# Altium PCB main.PcbDoc
Units mm, origin at the board's own origin, x right, y up, seen from the top; angles counter-clockwise.
Board outline 80 x 125 mm, 2 copper layers (Top Layer, Bottom Layer); 29 components, 91 nets, 296 pads, 11 vias.
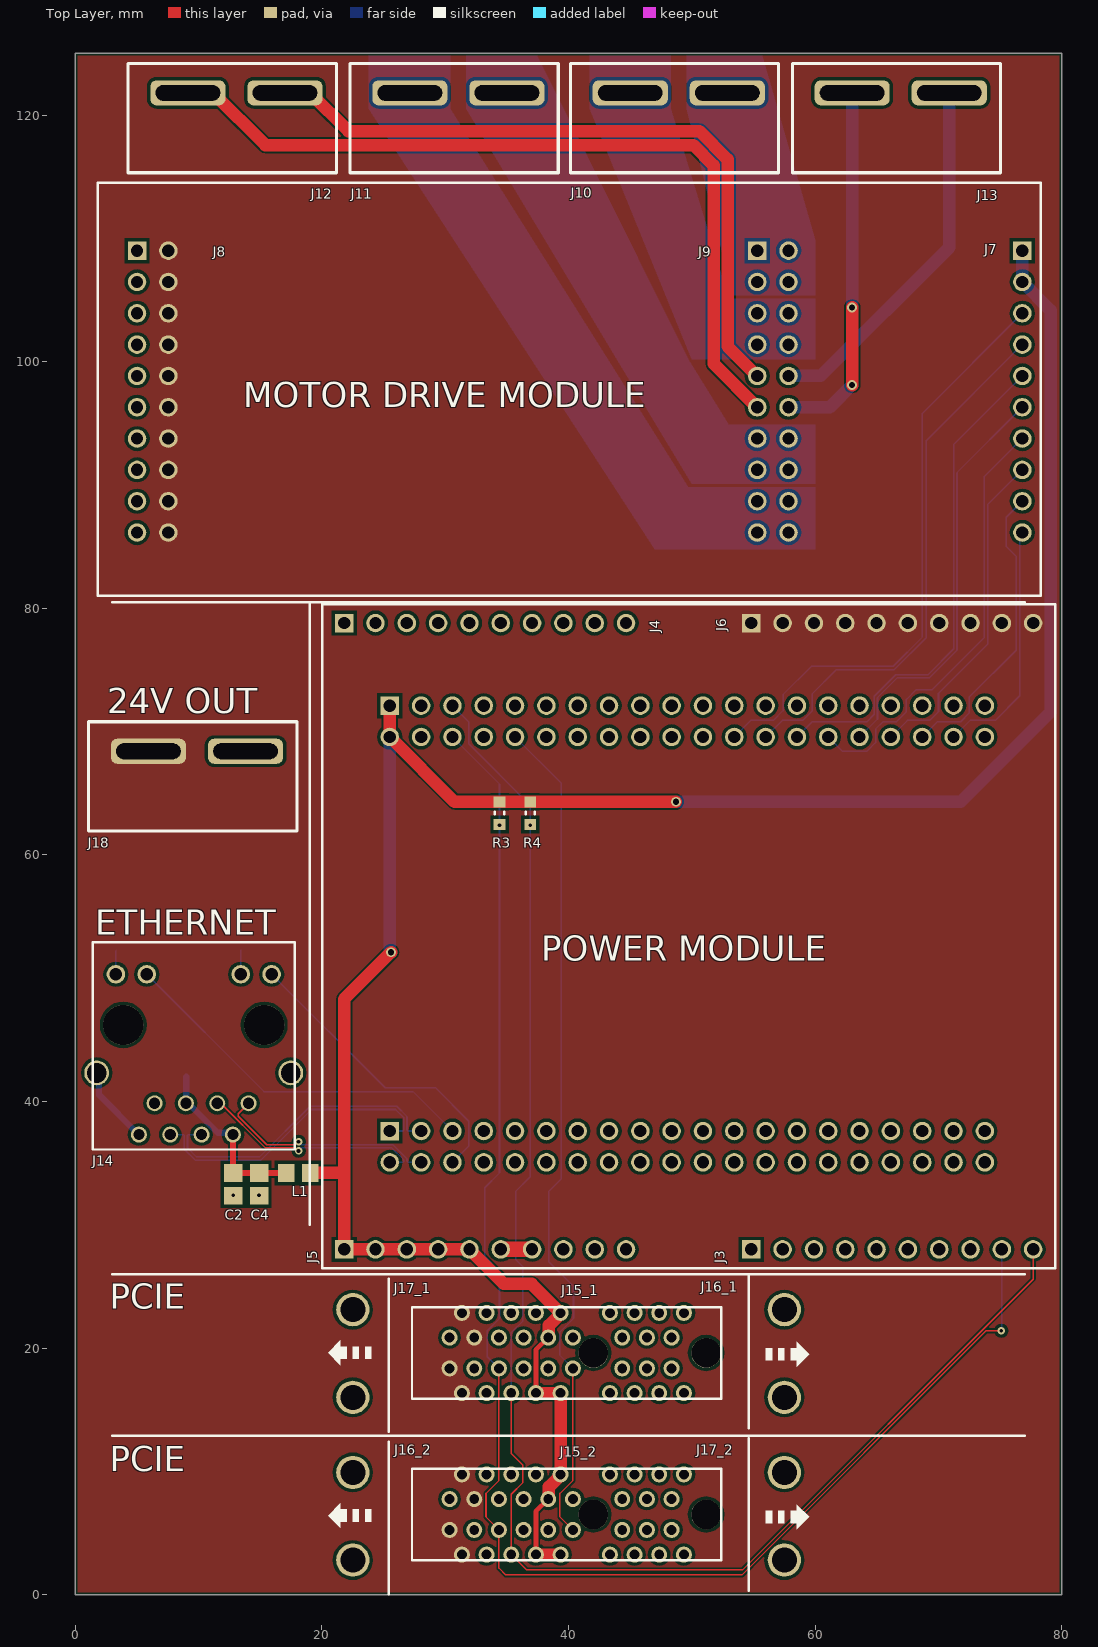
[diagram p0: Top Layer view]
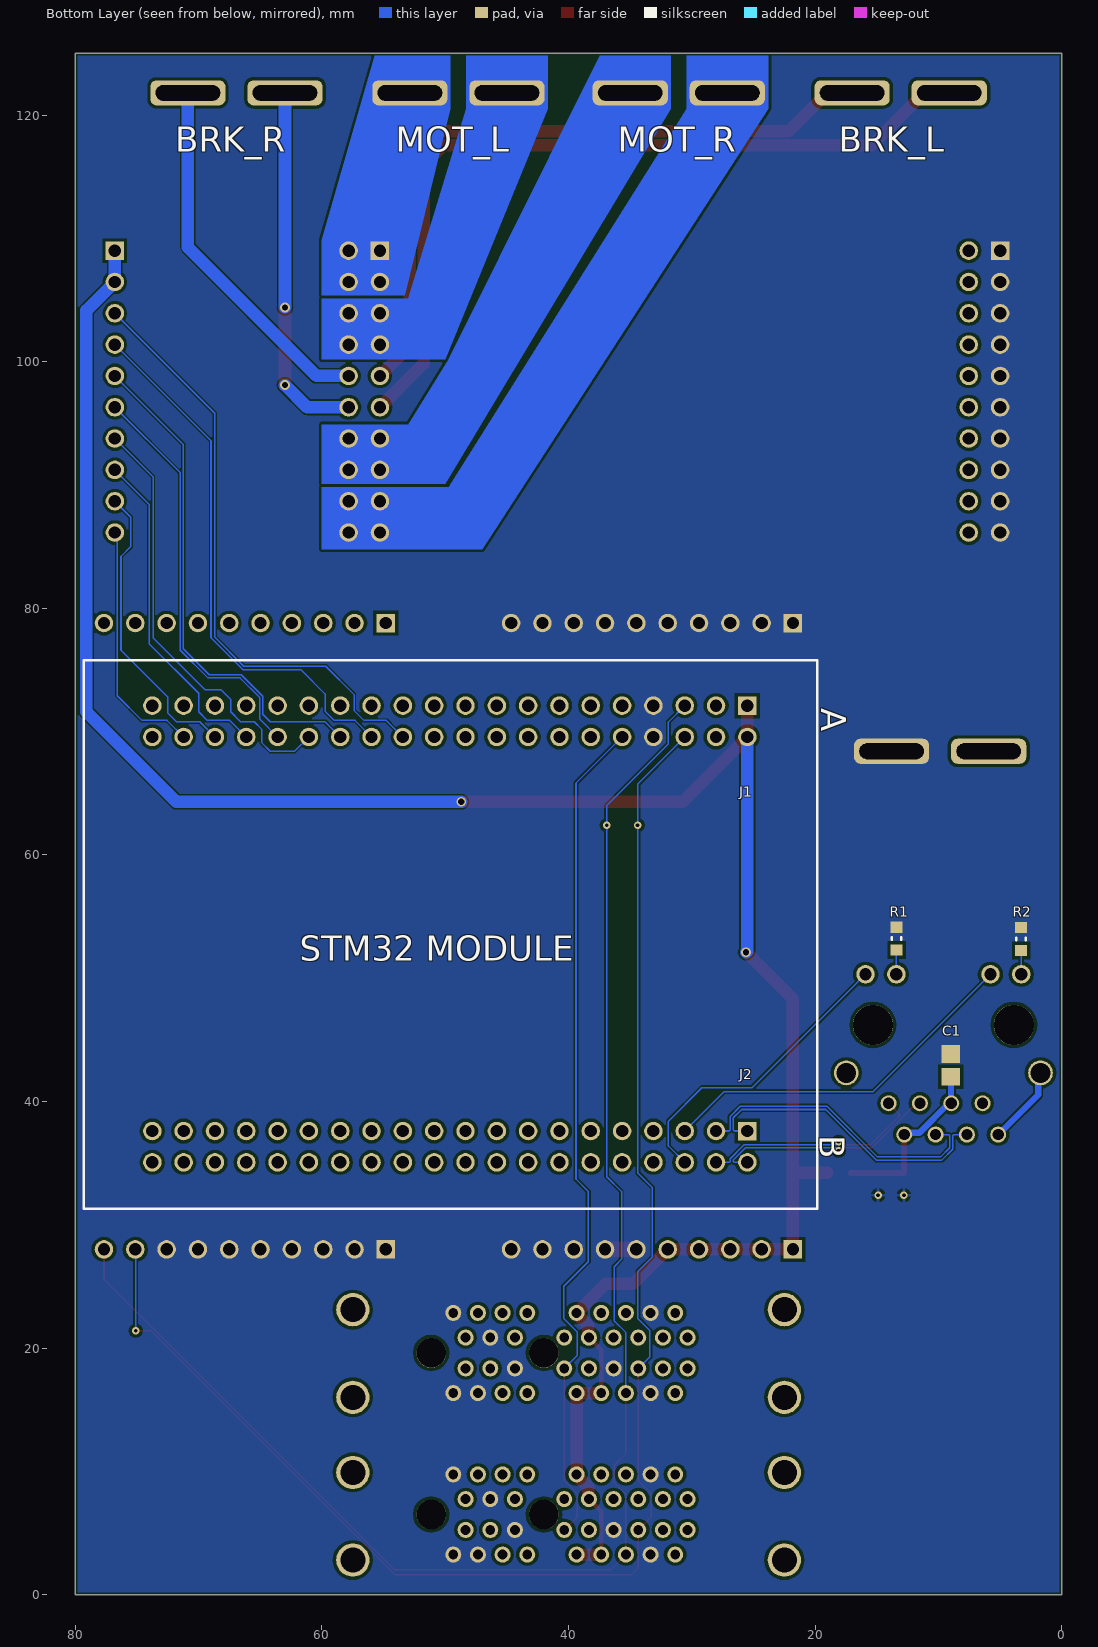
[diagram p1: Bottom Layer view, seen from below]
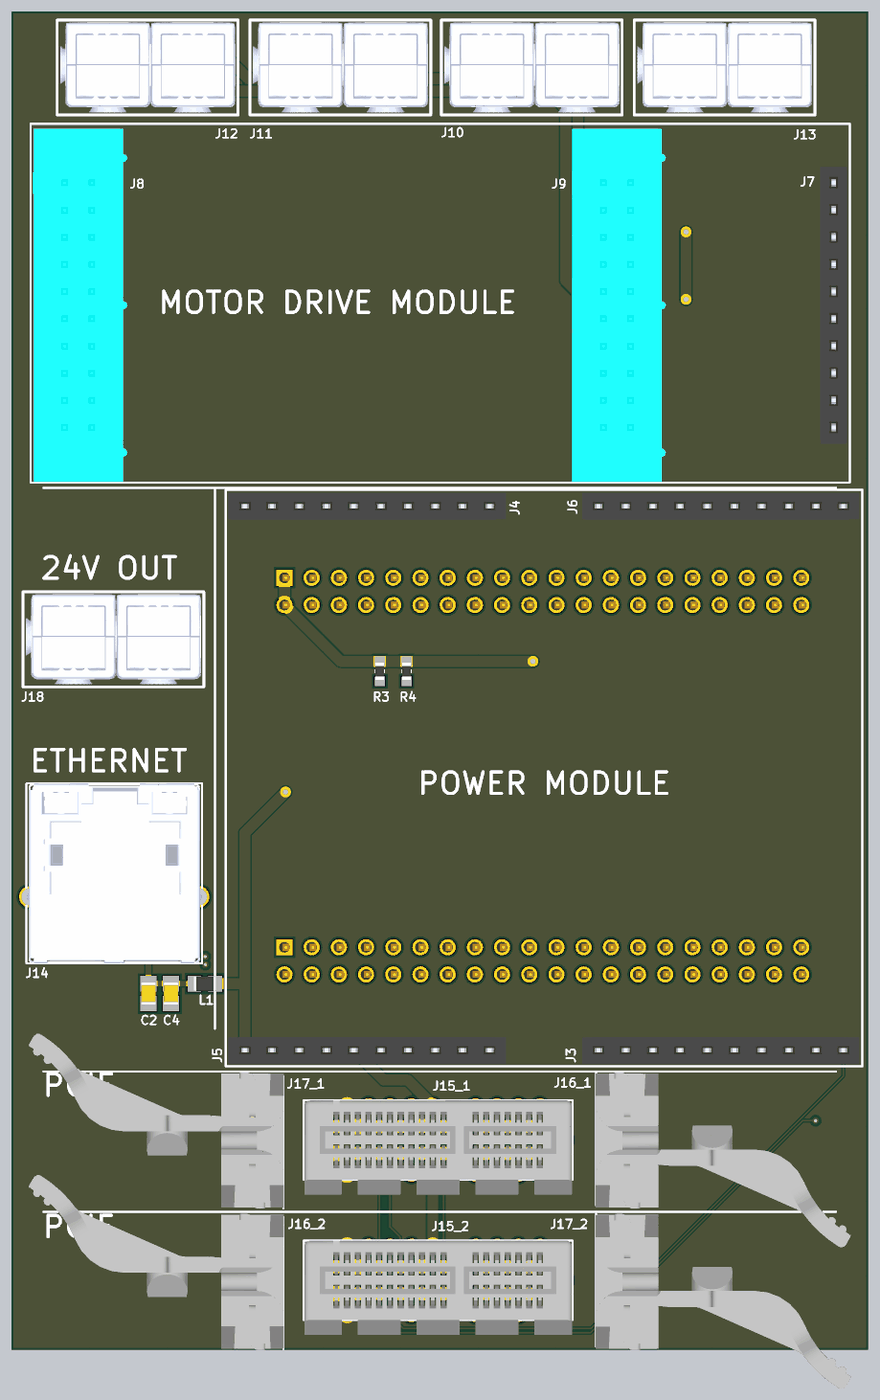
[diagram p2: 3D render of the assembled board from above, using the file's embedded part models]
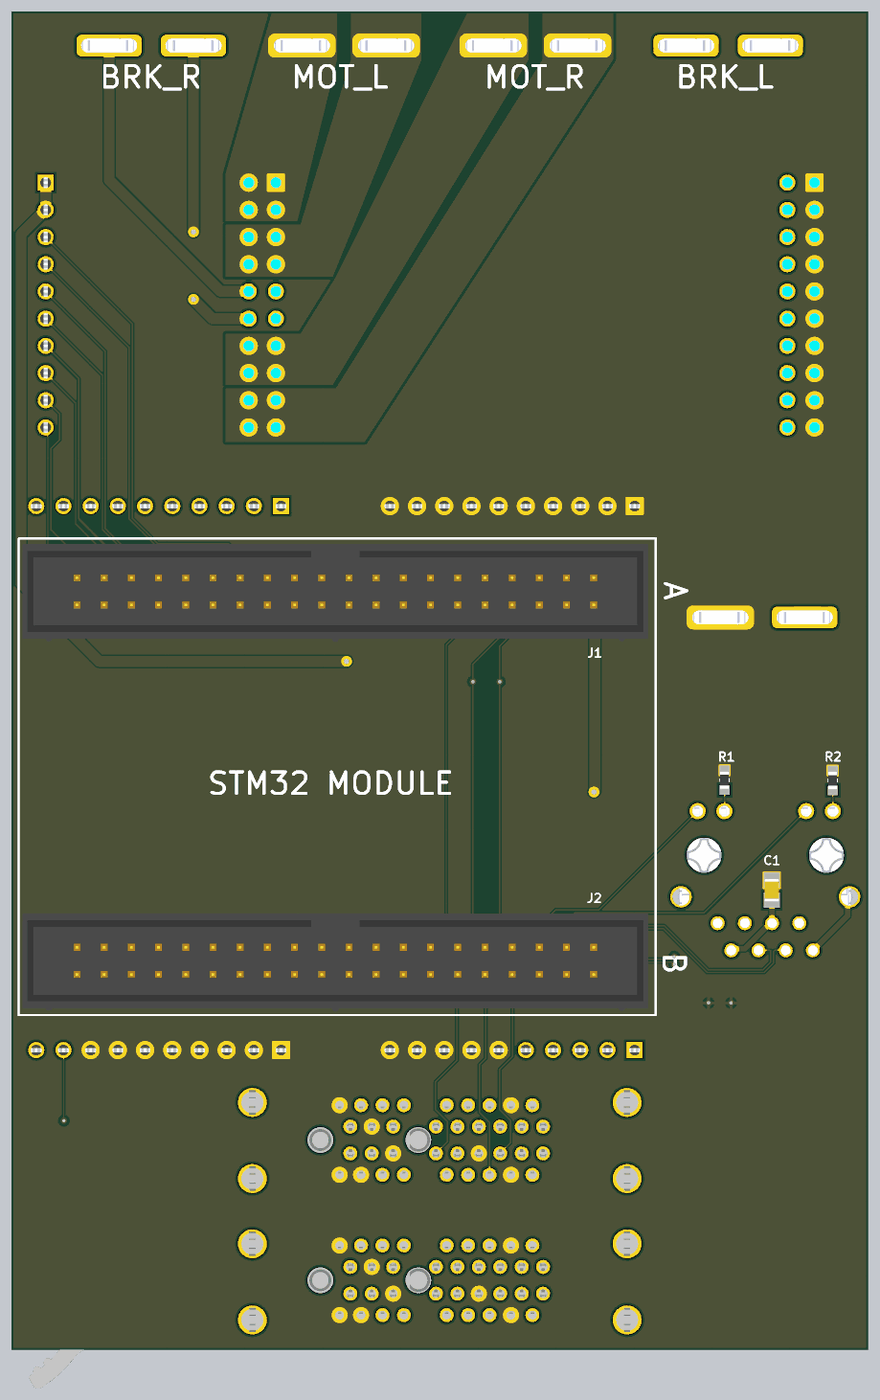
[diagram p3: 3D render of the assembled board from below, using the file's embedded part models]

## Layer stack, top to bottom
Top Solder: solder mask 0.0102, Solder Resist, Dk 3.5
Top Layer: signal copper 0.0356
Dielectric 1: dielectric 0.32, FR-4, Dk 4.8
Bottom Layer: signal copper 0.0356
Bottom Solder: solder mask 0.0102, Solder Resist, Dk 3.5

## Board outline
0,0 80,0 80,125 0,125

## Design rules (kind name [scope] priority, off if disabled: settings)
BoardOutlineClearance JLC_BoardOutlineClearance_Silk [OnLayer('Top Overlay')  or   OnLayer('Bottom Overlay')] p1: gap=0 ignorepadtopadclearanceinfootprint=FALSE
BoardOutlineClearance JLC_BoardOutlineClearance_Single [All] p2: gap=0.4 ignorepadtopadclearanceinfootprint=FALSE except(0: Arc-SplitContinuation Track-SplitContinuation SMDPad-SplitContinuation THPad-SplitContinuation Via-SplitContinuation Fill-SplitContinuation Poly-SplitContinuation Region-SplitContinuation Text-SplitContinuation; 0.2: Arc-OutlineEdge Track-OutlineEdge SMDPad-OutlineEdge THPad-OutlineEdge Via-OutlineEdge Fill-OutlineEdge Poly-OutlineEdge Region-OutlineEdge Text-OutlineEdge)
BoardOutlineClearance JLC_BoardOutlineClearance_Panel [All] p3: gap=0.4 ignorepadtopadclearanceinfootprint=FALSE except(0: Arc-SplitContinuation Track-SplitContinuation SMDPad-SplitContinuation THPad-SplitContinuation Via-SplitContinuation Fill-SplitContinuation Poly-SplitContinuation Region-SplitContinuation Text-SplitContinuation)
Clearance JLC_Clearance_SB [(HasFootprint('0603 Solder Bridge-Footprint-1'))] p1: gap=0.127 ignorepadtopadclearanceinfootprint=FALSE except(0: Fill-Hole Poly-Hole Region-Hole Text-Hole; 0.254: SMDPad-Fill SMDPad-Poly SMDPad-Region THPad-Fill THPad-Poly THPad-Region Via-Fill Via-Poly Via-Region)
Clearance JLC_Clearance_Top [All] p2: gap=0.127 ignorepadtopadclearanceinfootprint=FALSE except(0: Fill-Hole Poly-Hole Region-Hole Text-Hole; 0.254: SMDPad-Fill SMDPad-Poly SMDPad-Region THPad-Fill THPad-Poly THPad-Region Via-Fill Via-Poly Via-Region Fill-Fill Fill-Poly Fill-Region Poly-Poly Poly-Region Region-Region)
ComponentClearance JLC_ComponentClearance [All] p1: gap=0 collisioncheckmode=3 verticalgap=0 showdistances=FALSE
ComponentOrientations JLC_ComponentOrientations [All] p1: allowedrotations=32
DiffPairsRouting [All] p1: maxlimit=0.254 minlimit=0.127 mostfreqgap=0.127 toplayer_minwidth=0.127 toplayer_maxwidth=0.381 toplayer_prefwidth=0.127 bottomlayer_minwidth=0.127 bottomlayer_maxwidth=0.381 bottomlayer_prefwidth=0.127 maxuncoupledlength=12.7
Height JLC_Height [All] p1: minheight=0 maxheight=2539.975 prefheight=12.7
HoleSize JLC_HoleSize [All] p1: absolutevalues=TRUE maxlimit=1000 minlimit=0.305 maxpercent=80.000 minpercent=20.000
HoleToHoleClearance JLC_HoleToHoleClearance [All] p1: gap=0.305 allowstackedmicrovias=TRUE
MinimumAnnularRing JLC_MinimumAnnularRing [All] p1: minimumring=0.076
MinimumSolderMaskSliver JLC_MinimumSolderMaskSliver [All] p1: minsoldermaskwidth=0
PolygonConnect [All] p1: connectstyle=Relief reliefconductorwidth=0.254 reliefentries=4 polygonreliefangle="90 Angle" airgapwidth=0.254
RoutingVias JLC_RoutingVias [All] p1: holewidth=0.381 width=0.635 viastyle="Through Hole" minholewidth=0.305 minwidth=0.61 maxholewidth=6.299 maxwidth=12.7
SilkToSilkClearance JLC_SilkToSilkClearance [All] p1: silktosilkclearance=0
SilkToSolderMaskClearance JLC_SilkToSolderMaskClearance [IsPad] p1: minsilkscreentomaskgap=0 clearancetoexposedcopper=TRUE
SolderMaskExpansion [All] p1: expansion=0.102 istentingtop=FALSE
Width JLC_Width [All] p1: maxlimit=12.7 minlimit=0.127 preferedwidth=0.254
22 further rules are at their usual default settings.

## Classes and differential pairs
channel class bckpln: U_bckpln1 U_bckpln2
component class U_bckpln2: J15_2 J16_2 J17_2
component class U_motor_drv: J7 J8 J9 J10 J11 J12 J13
component class U_bckpln1: J15_1 J16_1 J17_1
component class U_stm32_module: J1 J2 R3 R4
component class U_power_module: J3 J4 J5 J6 J18
component class U_eth: C1 C2 C4 J14 L1 R1 R2
differential pair TD: +TD_P -TD_N
differential pair RD: +RD_P -RD_N

## Components (designator, comment, footprint, x,y, rotation, side; value= is the part's Value field where it differs from the comment)
C1 "100nF" "CAP 0805 L" 9,42.925 r90 bottom
C2 "100nF" "CAP 0805 L" 12.8,33.275 r90 top
C4 "10uF" "CAP 0805 L" 14.9,33.275 r90 top
J1 "2x20 M" "CONN HDR 2x20 M TOP" 25.5,72.1 r270 bottom
J2 "2x20 M" "CONN HDR 2x20 M TOP" 25.5,37.6 r270 bottom
J3 "1x10 F" "CONN HDR 1x10 F" 54.82,28 r90 top
J4 "1x10 F" "CONN HDR 1x10 F" 21.8,78.8 r90 top
J5 "1x10 F" "CONN HDR 1x10 F" 21.8,28 r90 top
J6 "1x10 F" "CONN HDR 1x10 F" 54.82,78.8 r90 top
J7 "1x10 F" "CONN HDR 1x10 F" 76.8,109 r0 top
J8 "2x10 M" "CONN HDR 2x10 M TOP" 5,109 r0 top
J9 "2x10 M" "CONN HDR 2x10 M TOP" 55.3,109 r0 top
J10 "pp45 2p" "CONN PP45 2P VERT" 52.874,121.8 r180 top
J11 "pp45 2p" "CONN PP45 2P VERT" 35,121.8 r180 top
J12 "pp45 2p" "CONN PP45 2P VERT" 17,121.8 r180 top
J13 "pp45 2p" "CONN PP45 2P VERT" 70.874,121.8 r180 top
J14 "rj45 w mag" "CONN RJ45 MAG VERT" 9.6,46.2 r180 top
J15_1 "PCIE x1 F Vert" "CONN PCIE x1 F Vert" 42,19.6 r0 top (schematic designator J15)
J15_2 "PCIE x1 F Vert" "CONN PCIE x1 F Vert" 42,6.5 r0 top (schematic designator J15)
J16_1 "PCIE Latch" "CONN PCIE F Latch" 57.5,16 r0 top (schematic designator J16)
J16_2 "PCIE Latch" "CONN PCIE F Latch" 22.5,9.91 r180 top (schematic designator J16)
J17_1 "PCIE Latch" "CONN PCIE F Latch" 22.5,23.11 r180 top (schematic designator J17)
J17_2 "PCIE Latch" "CONN PCIE F Latch" 57.5,2.8 r0 top (schematic designator J17)
J18 "pp45 2p" "CONN PP45 2P VERT" 13.8,68.4 r180 top
L1 "600R@100M" "IND 0805 L" 18.07,34.2 r180 top
R1 "330" "RES 0603 L" 13.4,53.2 r90 bottom
R2 "330" "RES 0603 L" 3.3,53.175 r90 bottom
R3 "4k7" "RES 0603 L" 34.4,63.375 r270 top
R4 "4k7" "RES 0603 L" 36.9,63.375 r270 top

## Footprints (in the part's own frame and the unit in brackets; to place one, negate y for a bottom-side part, rotate by r counter-clockwise, add the part's x,y. Pads: shape width x height; smd on the part's side, far side on the other; paste and mask are expansions set on the pad)
"CAP 0805 L" [mm] "Chip Capacitor, 2-Leads, Body 2.00x1.25mm, IPC Low Density"
  rect 1.45x1.5 smd: 1(-0.925,0) 2(0.925,0)
  body extent -1.05,-0.68 1.05,0.67, height 1.35
"CONN HDR 1x10 F" [mm]
  rect 1.5x1.5 hole 1: 1(0,0)
  round 1.5 hole 1: 2(0,-2.54) 3(0,-5.08) 4(0,-7.62) 5(0,-10.16) 6(0,-12.7) 7(0,-15.24) 8(0,-17.78) 9(0,-20.32) 10(0,-22.86)
  body extent -1.27,-24.38 1.23,1.52, height 8.51
"CONN HDR 2x10 M TOP" [mm]
  rect 1.5x1.5 hole 1: 1(0,0)
  round 1.5 hole 1: 2(2.54,0) 3(0,-2.54) 4(2.54,-2.54) 5(0,-5.08) 6(2.54,-5.08) 7(0,-7.62) 8(2.54,-7.62) 9(0,-10.16) 10(2.54,-10.16) 11(0,-12.7) 12(2.54,-12.7) 13(0,-15.24) 14(2.54,-15.24) 15(0,-17.78) 16(2.54,-17.78) 17(0,-20.32) 18(2.54,-20.32) 19(0,-22.86) 20(2.54,-22.86)
  body extent -3,-27.94 5.81,5.05, height 9.28
"CONN HDR 2x20 M TOP" [mm]
  rect 1.5x1.5 hole 1: 1(0,0)
  round 1.5 hole 1: 2(2.54,0) 3(0,-2.54) 4(2.54,-2.54) 5(0,-5.08) 6(2.54,-5.08) 7(0,-7.62) 8(2.54,-7.62) 9(0,-10.16) 10(2.54,-10.16) 11(0,-12.7) 12(2.54,-12.7) 13(0,-15.24) 14(2.54,-15.24) 15(0,-17.78) 16(2.54,-17.78) 17(0,-20.32) 18(2.54,-20.32) 19(0,-22.86) 20(2.54,-22.86) 21(0,-25.4) 22(2.54,-25.4) 23(0,-27.94) 24(2.54,-27.94) 25(0,-30.48) 26(2.54,-30.48) 27(0,-33.02) 28(2.54,-33.02) 29(0,-35.56) 30(2.54,-35.56) 31(0,-38.1) 32(2.54,-38.1) 33(0,-40.64) 34(2.54,-40.64) 35(0,-43.18) 36(2.54,-43.18) 37(0,-45.72) 38(2.54,-45.72) 39(0,-48.26) 40(2.54,-48.26)
  body extent -3.15,-53.48 6.02,4.98, height 9.11
"CONN PCIE F Latch" [mm]
  round 2.7 hole 2.03: ""(0,0) ""(0,7.11)
  silkscreen extent -2.9,-2.5 2,9.9, body extent -2.92,-6.42 20.89,9.91, height 19.01
"CONN PCIE x1 F Vert" [mm]
  round 1.3 hole 0.8: A1(-11.65,1.25) A2(-10.65,3.25) A3(-9.65,1.25) A4(-8.65,3.25) A5(-7.65,1.25) A6(-6.65,3.25) A7(-5.65,1.25) A8(-4.65,3.25) A9(-3.65,1.25) A10(-2.65,3.25) A11(-1.65,1.25) A12(1.35,3.25) A13(2.35,1.25) A14(3.35,3.25) A15(4.35,1.25) A16(5.35,3.25) A17(6.35,1.25) A18(7.35,3.25) B1(-11.65,-1.25) B2(-10.65,-3.25) B3(-9.65,-1.25) B4(-8.65,-3.25) B5(-7.65,-1.25) B6(-6.65,-3.25) B7(-5.65,-1.25) B8(-4.65,-3.25) B9(-3.65,-1.25) B10(-2.65,-3.25) B11(-1.65,-1.25) B12(1.35,-3.25) B13(2.35,-1.25) B14(3.35,-3.25) B15(4.35,-1.25) B16(5.35,-3.25) B17(6.35,-1.25) B18(7.35,-3.25)
  round 2.4 hole 2.4 unplated: ""(0,0) ""(9.15,0)
  silkscreen extent -14.7,-3.7 10.4,3.7, body extent -14.65,-5.1 10.35,3.7, height 11.01
"CONN PP45 2P VERT" [mil] "PowerPole45 vertical"
  rrect50% 240x80 hole 50 slot 206 at 0 deg: 1(0,0) 2(310,0)
  silkscreen extent -164,-94 501,255, body extent -154,-85 490,246, height 998
"CONN RJ45 MAG VERT" [mm]
  round 2 hole 1.6: 0(-7.875,3.89) 0(7.875,3.89)
  round 1.3 hole 0.9: 1(-4.445,6.35) 2(-3.175,8.89) 3(-1.905,6.35) 4(-0.635,8.89) 5(0.635,6.35) 6(1.905,8.89) 7(3.175,6.35) 8(4.445,8.89)
  round 1.5 hole 1: 9(-6.315,-4.11) 10(-3.815,-4.11) 11(3.815,-4.11) 12(6.315,-4.11)
  round 3.25 hole 3.25 unplated: ""(-5.715,0) ""(5.715,0)
  silkscreen extent -8.2,-6.7 8.2,10.1, body extent -8.15,-6.7 8.15,10.1, height 16.86
"IND 0805 L" [mm] "Chip Inductor, 2-Leads, Body 2.00x1.25mm, IPC Low Density"
  rect 1.32x1.49 smd: 1(-0.97,0) 2(0.97,0)
  body extent -1.05,-0.67 1.05,0.67, height 1.35
"RES 0603 L" [mm] "Chip Resistor, 2-Leads, Body 1.60x0.80mm, IPC Low Density"
  rect 0.9x0.95 smd: 1(-0.925,0) 2(0.925,0)
  silkscreen extent -0.1,-0.38 0.1,0.38, body extent -0.8,-0.4 0.8,0.4, height 0.45

## Part data
C1 C2 C4: library part "CAP 0805", "CAP 0805"
J1 J2: library part "CONN Header 2x20 M", "CONN Header 2x20 M", Supplier Part Number 1=ED10529-ND, Supplier 1=Digi-Key
J3 J4 J5 J6 J7: library part "CONN header 1x10 F", "CONN header 1x10 F", Supplier Part Number 1=S7008-ND, Supplier 1=Digi-Key
J8 J9: library part "CONN Header 2x10 M", "SBH11-PBPC-D10-ST-BK", Supplier Part Number 1=S9172-ND, Supplier 1=Digi-Key
J10 J11 J12 J13 J18: library part "CONN pp45 1x2 vert", "Heavy Duty Power Connectors PCB45 VERT.MT.SHORT TAIL LP CONT", Manufacturer 1="Anderson Power", Manufacturer Part Number 1=3-5911P1, Supplier Part Number 1=2243-3-5911P1-ND, Category=Connectors, ComponentLink1Description=http://www.andersonpower.com/files.php?file=DS-PP1545(2).pdf&src-supplier=Mouser, ComponentLink1URL=http://www.andersonpower.com/files.php?file=DS-PP1545(2).pdf&src-supplier=Mouser, Pricing 1="1=0.70000, 10=0.66000, 25=0.59400, 50=0.52800, 100=0.50600, 250=0.46200, 500=0.44000, 1000=0.36300, 2500=0.33000 (USD)", RoHS=Yes, Stock 1=4595, Supplier 1=Digi-Key
J14: library part "CONN rj45 mag vert", "Conn RJ-45 RCP 8 POS 2.54mm Solder ST Thru-Hole 12 Terminal 1 Port Tray", Color=Green,Yellow, Manufacturer 1=Pulse, Manufacturer Part Number 1=JD2-0010NL, Max Operating Temperature=70°C, Min Operating Temperature=0°C, Supplier Part Number 1=553-2608-ND, Category="Modular / Ethernet Connectors", ComponentLink1Description=http://www.farnell.com/datasheets/2699974.pdf?src-supplier=Farnell, ComponentLink1URL=http://www.farnell.com/datasheets/2699974.pdf?src-supplier=Farnell, ComponentLink2Description=http://productfinder.pulseeng.com/products/datasheets/JD2-0010NL.pdf?src-supplier=Avnet, ComponentLink2URL=http://productfinder.pulseeng.com/products/datasheets/JD2-0010NL.pdf?src-supplier=Avnet, ComponentLink3Description=https://productfinder.pulseeng.com/doc_type/WEB301/doc_num/JD2-0010NL-01/doc_part/JD2-0010NL.pdf?src-supplier=Digi-Key, ComponentLink3URL=https://productfinder.pulseeng.com/doc_type/WEB301/doc_num/JD2-0010NL-01/doc_part/JD2-0010NL.pdf?src-supplier=Digi-Key, Connector Type=RJ45, Contact Material="Copper Alloy", Contact Plating=Gold, Direction="User Selectable", Housing Material=Thermoplastic, Mount="Through Hole", Number of Cores per Jack=4, Number of Ports=1, Number of Rows=1, Orientation=Vertical, Packaging=Tray, Pricing 1="1=4.53000, 10=4.34400, 25=3.98200, 50=3.80100, 100=3.62000, 250=3.16752, 500=3.07700, 1000=2.62450, 2500=2.44350 (USD)", RoHS=Yes, Shielding=Shielded, Stock 1=5585, Supplier 1=Digi-Key, Termination=Solder
J15_1 J15_2: library part "CONN PCIE x1 F Vert", "10018784-10210TLF", Supplier Part Number 1=609-2029-ND, Supplier 1=Digi-Key
J16_1 J16_2 J17_1 J17_2: library part "CONN PCIE F Latch", "CONN ACCY CARD RETENTION BLACK", Manufacturer 1="Amphenol FCI", Manufacturer Part Number 1=10042618-003LF, Max Operating Temperature=85°C, Min Operating Temperature=-55°C, Package Quantity=300, Supplier Part Number 1=609-2061-ND, Voltage Rating=300V, Board Thickness=1.57mm, Category=Connectors, ComponentLink1Description=https://datasheet.ciiva.com/15207/getdatasheetpartid-305126-15207829.pdf?src-supplier=Verical, ComponentLink1URL=https://datasheet.ciiva.com/15207/getdatasheetpartid-305126-15207829.pdf?src-supplier=Verical, ComponentLink2Description=https://datasheet.ciiva.com/10954/10042618-10954687.pdf?src-supplier=Avnet, ComponentLink2URL=https://datasheet.ciiva.com/10954/10042618-10954687.pdf?src-supplier=Avnet, ComponentLink3Description=https://datasheet.ciiva.com/372/10042618-372637.pdf?src-supplier=Digi-Key, ComponentLink3URL=https://datasheet.ciiva.com/372/10042618-372637.pdf?src-supplier=Digi-Key, Contact Material="Copper Alloy", Contact Plating=Tin, Depth=16.21mm, Height=19mm, Housing Material=Nylon, Lead Free="Lead Free", Length=23.8mm, Orientation=Straight, Packaging=Bulk, Pricing 1="1=0.37000, 10=0.35400, 25=0.30320, 50=0.25780, 100=0.24770, 250=0.22244, 500=0.21232, 1000=0.17693, 2500=0.16176 (USD)", Radiation Hardening=No, RoHS=Yes, Stock 1=31046, Supplier 1=Digi-Key, Termination=Solder
L1: library part "IND 0805", "IND 0805"
R1 R2 R3 R4: library part "RES 0603", "RES 0603"

## Via types
v1: diameter 0.61, hole 0.305, Top Layer to Bottom Layer, tented both sides, 7 vias
v2: diameter 0.8, hole 0.5, Top Layer to Bottom Layer, 4 vias

## Nets (pads, with @x,y where several pads share a name; then routed paths per layer and width w, separated by ;. In a path a pad name is that pad's centre, name@x,y a point inside that pad or via, vN(x,y) a via of type N, cw(c..) or ccw(c..) an arc to the next point about the centre after c; other vN are vias at no path point)
3V3: J1.1 J1.2 J5.1 J5.2 J5.3 J5.4 J5.5 J7.1 J7.2 J15_1.A9 J15_1.A10 J15_1.B8 J15_1.B10 J15_2.A9 J15_2.A10 J15_2.B8 J15_2.B10 L1.1 R3.1 R4.1 | length 190.6
  Top Layer w0.381: J15_2.B8 37.35,6.75 J15_2.A9 ; J15_1.B8 37.35,19.85 J15_1.A9
  Top Layer w1.016: L1.1 21.8,34.2 ; J1.1 J1.2 30.76,64.3 v2(48.7,64.3) ; v2(25.6,52.1) 21.8,48.3 21.8,34.2 ; J15_2.B8 J15_2.B10 ; J15_1.B8 J15_1.B10 J15_2.A10 39.35,9.673 38.404,8.727 38.404,7.804 J15_2.A9 ; J15_1.A9 38.404,20.904 38.404,21.827 39.35,22.773 J15_1.A10 37,25.2 34.76,25.2 J5.5 J5.4 J5.3 J5.2 J5.1 21.8,34.2
  Bottom Layer w1.016: J1.2 25.5,52.2 v2(25.6,52.1) ; v2(48.7,64.3) 71.8,64.3 79.1,71.6 79.1,104.16 J7.2 J7.1
3V3_A: C1.1 C2.2 C4.2 J14.2 J14.5 L1.2 | length 14.4
  Top Layer w0.508: J14.2 12.788,37.297 12.788,34.212 C2.2 C4.2 L1.2
  Bottom Layer w0.508: C1.1 8.983,41.983 8.983,39.867 J14.5 9.153,39.85 11.542,37.462 12.623,37.462 J14.2
24V: J6.1 J6.2 J6.3 J6.4 J6.5 J6.6 J6.7 J6.8 J6.9 J6.10 J8.2 J8.4 J8.6 J8.8 J8.10 J8.12 J8.14 J8.16 J8.18 J8.20 J15_1.A2 J15_1.A3 J15_1.B1 J15_1.B2 J15_2.A2 J15_2.A3 J15_2.B1 J15_2.B2 J18.2
BAT_SCL: J1.6 J3.9 J15_1.B5 J15_2.B5 R3.2 | length 127.5
  Top Layer w0.127: J15_1.B5 34.35,9.25 33.3,8.2 33.3,6.3 J15_2.B5 34.35,2.15 34.9,1.6 54.059,1.6 73.859,21.4 v1(75.1,21.4) ; v1(34.4,62.4) R3.2
  Bottom Layer w0.127: J1.6 34.4,65.74 v1(34.4,62.4) 34.4,34.2 33.2,33 33.2,27.4 34.4,26.2 34.4,22.4 33.4,21.4 33.4,19.3 J15_1.B5 ; v1(75.1,21.4) 75.12,21.42 75.12,27.98 J3.9
BAT_SDA: J1.5 J3.10 J15_1.B6 J15_2.B6 R4.2 | length 128.5
  Top Layer w0.127: J15_1.B6 35.35,11.45 36.3,10.5 36.3,9.1 35.35,8.15 J15_2.B6 36.6,2 54.1,2 77.68,25.58 J3.10 ; v1(36.9,62.4) R4.2
  Bottom Layer w0.127: J1.5 31.9,70.78 31.9,69 36.9,64 v1(36.9,62.4) 36.9,33.9 35.7,32.7 35.7,27.2 36.3,26.6 36.3,22.2 35.35,21.25 J15_1.B6
BRK_A_L: J9.9 J12.1 | length 56.7
  Top Layer w1.016: J12.1 19.032,121.8 22.134,118.698 50.602,118.698 52.9,116.4 52.9,101.24 J9.9
BRK_A_R: J9.10 J13.1 | length 29.9
  Bottom Layer w1.016: J9.10 60.44,98.84 70.874,109.274 J13.1
BRK_B_L: J9.11 J12.2 | length 66.2
  Top Layer w1.016: J12.2 11.158,121.8 15.403,117.555 50.128,117.555 51.757,115.927 51.757,99.843 J9.11
BRK_B_R: J9.12 J13.2 | length 29.6
  Top Layer w1.016: v2(63,98.1) v2(63,104.4)
  Bottom Layer w1.016: J9.12 61.2,96.3 v2(63,98.1) ; v2(63,104.4) J13.2
BRK_L: J1.24 J7.3 | length 49
  Bottom Layer w0.127: J1.24 54.78,70.9 56.6,70.9 57.4,71.7 57.4,73 59.7,75.3 66.341,75.3 68.7,77.659 68.7,95.82 J7.3
BRK_R: J1.26 J7.4 | length 44.2
  Bottom Layer w0.127: J1.26 57.32,70.9 59,70.9 59.75,71.65 59.75,73.05 61.7,75 66.4,75 69,77.6 69,93.58 J7.4
BUS_INT: J1.10 J15_1.B11 J15_2.B11 | length 68.9
  Top Layer w0.127: J15_2.B11 39.3,6.3 39.3,8.2 40.35,9.25 J15_1.B11
  Bottom Layer w0.127: J1.10 39.4,65.82 39.4,33.7 38.4,32.7 38.4,27 40.4,25 40.4,22.4 39.3,21.3 39.3,19.4 J15_1.B11
DIR_L: J1.30 J7.7 | length 35.6
  Bottom Layer w0.127: J1.30 62.22,68.4 64.2,68.4 64.9,69.1 64.9,70.2 65.5,70.8 66.6,70.8 67.4,71.6 67.4,72.6 68.2,73.4 69.5,73.4 73.7,77.6 73.7,90.66 J7.7
DIR_R: J1.34 J7.8 | length 27.1
  Bottom Layer w0.127: J1.34 67.48,70.9 69.3,70.9 70,71.6 70,73.1 74,77.1 74,88.42 J7.8
GND: C1.2 C2.1 C4.1 J1.7 J1.8 J3.1 J3.2 J3.3 J3.4 J3.5 J3.6 J3.7 J3.8 J4.1 J4.2 J4.3 J4.4 J4.5 J4.6 J4.7 J4.8 J4.9 J4.10 J5.6 J5.7 J5.8 J5.9 J5.10 J8.1 J8.3 J8.5 J8.7 J8.9 J8.11 J8.13 J8.15 J8.17 J8.19 J15_1.A4 J15_1.A15 J15_1.A18 J15_1.B4 J15_1.B7 J15_1.B13 J15_1.B16 J15_1.B18 J15_2.A4 J15_2.A15 J15_2.A18 J15_2.B4 J15_2.B7 J15_2.B13 J15_2.B16 J15_2.B18 J18.1 R1.2 R2.2 | length 2.6
  Top Layer w0.508: C2.1 v1(12.8,32.4) ; C4.1 v1(14.9,32.4)
  Top Layer w1.27: J5.6 J5.7
LED1: J2.6 J14.9 | length 24.8
  Bottom Layer w0.127: J14.9 25.125,41.1 29.2,41.1 31.9,38.4 31.9,36.38 J2.6
LED2: J2.5 J14.11 | length 30.1
  Bottom Layer w0.127: J14.11 15.295,40.8 27.38,40.8 J2.5
MOT_A_L: J9.1 J9.2 J9.3 J9.4 J10.1
MOT_A_R: J9.13 J9.14 J9.15 J9.16 J11.1
MOT_B_L: J9.5 J9.6 J9.7 J9.8 J10.2
MOT_B_R: J9.17 J9.18 J9.19 J9.20 J11.2
NetJ14_10: J14.10 R1.1 | length 2
  Bottom Layer w0.127: R1.1 13.415,52.26 J14.10
NetJ14_12: J14.12 R2.1 | length 1.9
  Bottom Layer w0.127: J14.12 3.285,52.235 R2.1
PB11: J1.4
PB12: J1.3
PB15: J2.8
PC0: J2.7
PC2: J2.9
PC3: J2.11
PC6: J2.13
PC7: J2.10
PC8: J2.12
PC10: J2.14
PC11: J2.16
PC12: J2.18
PD0: J2.20
PD1: J2.22
PD2: J2.24
PD5: J2.26
PD6: J2.28
PD7: J2.30
PD11: J2.32
PD12: J2.34
PD13: J2.36
PD14: J2.38
PD15: J2.40
PE0: J1.12
PE2: J1.14
PE3: J1.16
PE4: J1.18
PE5: J1.20
PE6: J1.22
PE9: J1.28 J7.5 | length 41
  Bottom Layer w0.127: J1.28 59.76,70.8 64.2,70.8 64.8,71.4 64.8,72.859 66.541,74.6 69.141,74.6 71.246,76.705 71.246,93.286 J7.5
PE11: J1.32 J7.6 | length 33.7
  Bottom Layer w0.127: J1.32 65.054,71.014 65.054,72.754 66.646,74.346 69.246,74.346 71.5,76.6 71.5,91 J7.6
PE13: J1.36 J7.9 | length 24.2
  Bottom Layer w0.127: J1.36 69.92,70.8 71.8,70.8 72.5,71.5 72.5,72.8 76.3,76.6 76.3,84.2 75.5,85 75.5,87.38 J7.9
PE14: J1.38 J7.10 | length 20.1
  Bottom Layer w0.127: J1.38 72.56,70.9 74.6,70.9 76.6,72.9 76.6,85.94 J7.10
PE15: J1.40
PF0: J1.9
PF1: J1.11
PF2: J1.13
PF3: J1.15
PF4: J1.17
PF5: J1.19
PF6: J1.21
PF7: J1.23
PF8: J1.25
PF9: J1.27
PF10: J1.29
PF11: J1.31
PF12: J1.33
PF13: J1.35
PF14: J1.37
PF15: J1.39
PG0: J2.15
PG1: J2.17
PG2: J2.19
PG3: J2.21
PG4: J2.23
PG5: J2.25
PG6: J2.27
PG8: J2.29
PG9: J2.31
PG10: J2.33
PG12: J2.35
PG14: J2.37
PG15: J2.39
RD_N: J2.3 J14.4 | length 24.6
  Bottom Layer w0.127: J14.4 9.166,37.31 9.092,37.236 9.092,36.235 9.827,35.5 14.941,35.5 19.041,39.6 26.068,39.6 26.897,38.771 26.897,37.674 26.971,37.6 J2.3
RD_P: J2.1 J14.6 | length 24.6
  Bottom Layer w0.127: J14.6 8.764,37.31 8.838,37.236 8.838,36.13 9.722,35.246 15.046,35.246 19.146,39.346 25.963,39.346 26.643,38.666 26.643,37.674 26.569,37.6 J2.1
SHGND: J14.0@1.725,42.31 J14.8 | length 6.4
  Bottom Layer w0.508: J14.0@1.725,42.31 1.917,42.118 1.917,40.548 J14.8
TD_N: J2.4 J14.1 | length 18.2
  Top Layer w0.127: J14.1 13.2,39.005 13.2,38.8 15.52,36.48 17.784,36.48 18.026,36.721 v1(18.1,36.721)
  Bottom Layer w0.127: v1(18.1,36.721) 18.1,36.659 18.28,36.48 25.77,36.48 26.897,35.352 26.897,35.134 26.971,35.06 J2.4
TD_P: J2.2 J14.3 | length 18.6
  Top Layer w0.127: J14.3 11.791,39.85 15.415,36.226 17.784,36.226 18.026,35.984 v1(18.1,35.984)
  Bottom Layer w0.127: v1(18.1,35.984) 18.1,36.046 18.28,36.226 25.664,36.226 26.643,35.247 26.643,35.134 26.569,35.06 J2.2
pads on no net: J14. J14.0@17.475,42.31 J14.7 J15_1. J15_1.A1 J15_1.A5 J15_1.A6 J15_1.A7 J15_1.A8 J15_1.A11 J15_1.A12 J15_1.A13 J15_1.A14 J15_1.A16 J15_1.A17 J15_1.B3 J15_1.B9 J15_1.B12 J15_1.B14 J15_1.B15 J15_1.B17 J15_2. J15_2.A1 J15_2.A5 J15_2.A6 J15_2.A7 J15_2.A8 J15_2.A11 J15_2.A12 J15_2.A13 J15_2.A14 J15_2.A16 J15_2.A17 J15_2.B3 J15_2.B9 J15_2.B12 J15_2.B14 J15_2.B15 J15_2.B17 J16_1. J16_2. J17_1. J17_2.

## Polygon pours and split planes (outlines as drawn)
24V on Top Layer "24V_L01_P000" (solid, remove dead copper, pour order 0): 0,125 80,125 80,0 0,0
GND on Bottom Layer "GND_L02_P003" (solid, remove dead copper, pour order 3): 0,125 0,0 80,0 80,125

## Other copper
Bottom Layer:
  region net MOT_A_L: 53.3,105.4 60,105.4 60,109.851 55.712,124.8 49.6,124.8 49.6,120.5
  region net MOT_B_L: 60,105.1 53,105.1 48.3,120.5 48.3,124.8 41.7,124.8 41.7,120.5 50,100.2 60,100.2
  region net MOT_B_R: 60,89.8 49.7,89.8 30.4,120.5 30.4,124.8 23.8,124.8 23.8,120.5 47,84.8 60,84.8
  region net MOT_A_R: 60,94.9 53,94.9 49.7,100.2 37.454,124.8 31.7,124.8 31.7,120.5 50,90.1 60,90.1

## Silkscreen, mask and mechanical layers (free items; w line width, h text height)
Top Overlay:
  lines w0.2: 3,12.9 77,12.9 ; 3,26 77,26 ; 3,80.5 77,80.5 ; 19,30 19,80.5 ; 1.8,81 78.3,81 78.3,114.5 1.8,114.5 1.8,81 ; 20.022,26.476 20.022,80.324 79.458,80.324 79.458,26.476 20.022,26.476
  text "MOTOR DRIVE MODULE" at 13.6,96.3 h2
  text "24V OUT" at 2.6,71.5 h2
  text "ETHERNET" at 1.6,53.5 h2
  text "POWER MODULE" at 37.8,51.4 h2
  text "PCIE" at 2.8,23.2 h2
  text "PCIE" at 2.8,10 h2
Bottom Overlay:
  lines w0.2: 19.834,31.28 79.334,31.28 79.334,75.78 19.834,75.78 19.834,31.28
  text "BRK_L" at 18.1,117.034 h2
  text "MOT_R" at 36,117.034 h2
  text "MOT_L" at 54,117.034 h2
  text "BRK_R" at 71.9,117.034 h2
  text "A" at 19.5,71.9 h2 r90
  text "STM32 MODULE" at 61.8,51.4 h2
  text "B" at 19.618,37.247 h2 r90
Mechanical 1:
  the board outline again, w0.25